# EAGLE board SolderSync_v1_PCB_incomplete (EAGLE 9.7.0)

Size 160 x 116.51 mm. Coordinates in mm from the lower left corner, seen from the top.
Outline: 0,0 160,0 160,116.51 0,116.51 0,0
Copper layers (1*16): Top 0.035mm / dielectric 1.5mm / Bottom 0.035mm
Design rules "Fusion Electronics Design Rules": minimum track width 6mil, minimum drill 0.35mm, track to track 6mil, track to pad 6mil, pad to pad 6mil, via to via 6mil, smd to smd 6mil, copper to edge 40mil, drill to drill 6mil, minimum pad ring 10mil, minimum via ring 8mil, stop-mask expansion 4mil, vias tented up to drill 0mil, thermal gap 10mil

## Footprints (pad centres in the part's own frame; a part is rotated, then mirrored left to right if it is on the bottom)
SW_EVQ22705R_PAN = drill 0.762 pad 1.27 square: 1 0,0 | drill 0.762 pad 1.27: 2 5.004,0
CAPC2012X110 = smd 1.165 x 1.465: 1 -0.875,0; 2 0.875,0
CAPAE830X1050N = smd 3.764 x 2.115: 1 -3.426,0; 2 3.426,0
LEDC2012X110N_FLAT-B = smd 0.762 x 1.362: A 1.025,0; C -1.025,0
SOD-123FL = smd 0.91 x 1.22: A 1.637,0; C -1.637,0
USB-C = smd 0.356 x 0.94: A1 -3.75,3.027; A4 -2.75,3.027; A5 -1.75,3.027; A6 -0.75,3.027; A7 0.75,3.027; A8 1.75,3.027; A9 2.75,3.027; A12 3.75,3.027; B1 3.25,3.027; B4 2.25,3.027; B5 1.25,3.027; B6 0.25,3.027; B7 -0.25,3.027; B8 -1.25,3.027; B9 -2.25,3.027; B12 -3.25,3.027; MID1 -4.25,3.027; MID2 4.25,3.027 | drill 0.025 pad 2.464 long: S_1 -5.4,-0.823; S_2 5.4,-0.823 | drill 0.559 pad 0.559: S_1_H1 -5.4,-0.176; S_1_H2 -5.4,-1.471; S_2_H1 5.4,-0.176; S_2_H2 5.4,-1.471; S_3_H1 -5.4,3.181; S_3_H2 -5.4,1.632; S_4_H1 5.4,3.181; S_4_H2 5.4,1.632 | drill 0.025 pad 2.718 long: S_3 -5.4,2.407; S_4 5.4,2.407
SC59 = smd 1 x 1.4: B -0.95,-1.2; C 0,1.2; E 0.95,-1.2
RESC2012X65 = smd 1.031 x 1.42: 1 -0.919,0; 2 0.919,0
PV36W = drill 1 pad 1.7: 1 0,0; 2 2.54,0; 3 5.08,0
30-PIN = drill 1.016 octagon: 1 -20.32,-1.27; 2 -20.32,1.27; 3 -17.78,-1.27; 4 -17.78,1.27; 5 -15.24,-1.27; 6 -15.24,1.27; 7 -12.7,-1.27; 8 -12.7,1.27; 9 -10.16,-1.27; 10 -10.16,1.27; 11 -7.62,-1.27; 12 -7.62,1.27; 13 -5.08,-1.27; 14 -5.08,1.27; 15 -2.54,-1.27; 16 -2.54,1.27; 17 0,-1.27; 18 0,1.27; 19 2.54,-1.27; 20 2.54,1.27; 21 5.08,-1.27; 22 5.08,1.27; 23 7.62,-1.27; 24 7.62,1.27; 25 10.16,-1.27; 26 10.16,1.27; 27 12.7,-1.27; 28 12.7,1.27; 29 15.24,-1.27; 30 15.24,1.27
ESP32_SCH_PCB = smd 1.499 x 0.889: 1 -8.75,5.26; 2 -8.75,3.99; 3 -8.75,2.72; 4 -8.75,1.45; 5 -8.75,0.18; 6 -8.75,-1.09; 7 -8.75,-2.36; 8 -8.75,-3.63; 9 -8.75,-4.9; 10 -8.75,-6.17; 11 -8.75,-7.44; 12 -8.75,-8.71; 13 -8.75,-9.98; 14 -8.75,-11.25; 25 8.75,-11.25; 26 8.75,-9.98; 27 8.75,-8.71; 28 8.75,-7.44; 29 8.75,-6.17; 30 8.75,-4.9; 31 8.75,-3.63; 32 8.75,-2.36; 33 8.75,-1.09; 34 8.75,0.18; 35 8.75,1.45; 36 8.75,2.72; 37 8.75,3.99; 38 8.75,5.26 | smd 0.889 x 1.499: 15 -5.715,-12.501; 16 -4.445,-12.501; 17 -3.175,-12.501; 18 -1.905,-12.501; 19 -0.635,-12.501; 20 0.635,-12.501; 21 1.905,-12.501; 22 3.175,-12.501; 23 4.445,-12.501; 24 5.715,-12.501 | smd 1.041 x 1.041: 39 -0.681,-2.08; 40 -2.205,-0.556; 41 -2.205,-2.08; 42 -2.205,-3.604; 43 -0.681,-3.604; 44 0.843,-3.604; 45 0.843,-2.08; 46 0.843,-0.556; 47 -0.681,-0.556
_AMS-L = smd 0.838 x 1.168: 1 -2.29,-3.213; 2 0,-3.213; 3 2.29,-3.213 | smd 3.15 x 1.168: 4 0,3.213
_ADS-L = smd 0.838 x 2.184: 1 -2.29,-2.705; 2 0,-2.705; 3 2.29,-2.705 | smd 3.15 x 2.184: 4 0,2.705
SOIC127P600X180-16N = smd 1.31 x 0.62: 1 -2.75,4.445; 2 -2.75,3.175; 3 -2.75,1.905; 4 -2.75,0.635; 5 -2.75,-0.635; 6 -2.75,-1.905; 7 -2.75,-3.175; 8 -2.75,-4.445; 9 2.75,-4.445; 10 2.75,-3.175; 11 2.75,-1.905; 12 2.75,-0.635; 13 2.75,0.635; 14 2.75,1.905; 15 2.75,3.175; 16 2.75,4.445
_MXM-L = smd 1.257 x 0.483: 1 -2.623,1.905; 2 -2.623,0.635; 3 -2.623,-0.635; 4 -2.623,-1.905; 5 2.623,-1.905; 6 2.623,-0.635; 7 2.623,0.635; 8 2.623,1.905
N08E_TEX = drill 0.813 pad 1.524 square: 1 0,0 | drill 0.813 pad 1.524: 2 0,-2.54; 3 0,-5.08; 4 0,-7.62; 5 7.62,-7.62; 6 7.62,-5.08; 7 7.62,-2.54; 8 7.62,0
LCD_SCH = drill 0.127 pad 0.254: 1 21.59,0; 2 20.32,0; 3 19.05,0; 4 17.78,0; 5 16.51,0; 6 15.24,0; 7 13.97,0; 8 12.7,0; 9 11.43,0; 10 10.16,0; 11 8.89,0; 12 7.62,0; 13 6.35,0; 14 5.08,0; 15 3.81,0; 16 2.54,0; 17 1.27,0; 18 0,0
XTALRR488W45L1150T500H350B = drill 0.657 pad 1.257: 1 -2.44,0; 2 2.44,0

## Placement (x,y rotation side)
BOOT  EVQ22705RSW_EVQ22705R_PAN  [SW_EVQ22705R_PAN]  140.97,83.82 0 top
C1  10u  [CAPC2012X110]  86.36,33.02 0 top
C2  100n  [CAPC2012X110]  86.36,27.94 0 top
C3  10u  [CAPC2012X110]  74.93,11.43 0 top
C4  100n  [CAPC2012X110]  67.31,11.43 0 top
C5  100n  [CAPC2012X110]  81.28,4.6 0 top
C6  100u  [CAPC2012X110]  81.28,11.43 0 top
C7  100n  [CAPC2012X110]  82.55,54.61 0 top
C8  100u  [CAPC2012X110]  82.55,46.99 0 top
C9  22p  [CAPC2012X110]  63.5,55.88 0 top
C10  22p  [CAPC2012X110]  63.5,48.26 0 top
C11  0.1u  [CAPC2012X110]  63.5,27.94 0 top
C12  1n  [CAPC2012X110]  130.81,62.23 0 top
C13  1n  [CAPC2012X110]  130.81,54.61 0 top
C14  0.01u  [CAPC2012X110]  11.43,106.68 0 top
C15  0.01u  [CAPC2012X110]  11.43,50.8 0 top
C16  0.01u  [CAPC2012X110]  11.43,19.05 0 top
C17  0.01u  [CAPC2012X110]  62.23,105.41 0 top
C18  22p  [CAPC2012X110]  60.96,82.55 0 top
C19  [CAPAE830X1050N]  53.34,86.36 0 top
C20  1000u  [CAPAE830X1050N]  97.79,110.49 0 top
C21  100n  [CAPC2012X110]  95.25,100.33 0 top
C22  100u  [CAPC2012X110]  95.25,92.71 0 top
C23  100u  [CAPC2012X110]  95.25,85.09 0 top
C24  10u  [CAPC2012X110]  95.25,77.47 0 top
D1  LED  [LEDC2012X110N_FLAT-B]  120.65,90.17 0 top
D2  LED  [LEDC2012X110N_FLAT-B]  120.65,82.55 0 top
D3  1N4007  [SOD-123FL]  62.23,100.33 0 top
D4  1N4007  [SOD-123FL]  62.23,96.52 0 top
D5  1N4007  [SOD-123FL]  62.23,92.71 0 top
D6  1N4007  [SOD-123FL]  62.23,88.9 0 top
D7  LED  [LEDC2012X110N_FLAT-B]  95.25,20.32 0 top
D8  LED  [LEDC2012X110N_FLAT-B]  95.25,5.08 0 top
EN  EVQ22705RSW_EVQ22705R_PAN  [SW_EVQ22705R_PAN]  142.24,39.37 0 top
J1  USB-CCX90M-16P_HIR  [USB-C]  132.08,102.87 0 top
Q1  J3Y_NPN  [SC59]  49.53,24.13 0 top
Q2  J3Y_NPN  [SC59]  49.53,16.51 0 top
R1  1k  [RESC2012X65]  64.77,40.64 0 top
R2  1k  [RESC2012X65]  64.77,35.56 0 top
R3  10k  [RESC2012X65]  41.91,20.32 0 top
R4  10k  [RESC2012X65]  64.77,19.05 0 top
R5  470  [RESC2012X65]  129.54,92.71 0 top
R6  10k  [RESC2012X65]  129.54,85.09 0 top
R7  470  [RESC2012X65]  129.54,77.47 0 top
R8  10k  [RESC2012X65]  129.54,69.85 0 top
R9  5.11k  [RESC2012X65]  119.38,105.41 0 top
R10  5.11k  [RESC2012X65]  119.38,97.79 0 top
R11  1k  [RESC2012X65]  118.11,74.93 0 top
R12  1k  [RESC2012X65]  118.11,67.31 0 top
R13  150  [RESC2012X65]  50.8,74.93 0 top
R14  150  [RESC2012X65]  50.8,67.31 0 top
R15  150  [RESC2012X65]  50.8,59.69 0 top
R16  150  [RESC2012X65]  50.8,52.07 0 top
R17  0  [RESC2012X65]  95.25,69.85 0 top
R18  10k  [PV36W]  96.52,36.83 0 top
R19  1k  [RESC2012X65]  95.25,27.94 0 top
R20  1k  [RESC2012X65]  95.25,12.7 0 top
SV2  [30-PIN]  153.67,38.1 90 top
U1  ESP32ESP-WROOM-32_EXP  [ESP32_SCH_PCB]  121.92,41.91 0 top
U2  AMS1117-5.0_AMS-L  [_AMS-L]  76.2,29.21 0 top
U3  AMS1117-3.3_ADS-L  [_ADS-L]  76.2,17.78 0 top
U4  CH340G  [SOIC127P600X180-16N]  76.2,52.07 0 top
U5  MAX31855_MXM-L  [_MXM-L]  25.4,95.25 0 top
U6  MAX31855_MXM-L  [_MXM-L]  25.4,71.12 0 top
U7  MAX31855_MXM-L  [_MXM-L]  25.4,39.37 0 top
U8  MAX31855_MXM-L  [_MXM-L]  25.4,7.62 0 top
U9  LM386_N-1  [N08E_TEX]  105.41,62.23 0 top
U$1  LCD_DEVBOARD  [LCD_SCH]  134.62,2.54 0 top
XTAL1  12MHz  [XTALRR488W45L1150T500H350B]  52.07,39.37 0 top

## Library data of the parts
BOOT EN = SD-SolderSync-Library; COPYRIGHT: Copyright (C) 2024 Ultra Librarian. All rights reserved.; MANUFACTURER_PART_NUMBER: EVQ-22705R; MFR_NAME: Panasonic
C1-C24 = Capacitor; CATEGORY: Capacitor
D1 D2 D7 D8 = LED; CATEGORY: LED; COLOR: BLUE; DESCRIPTION: CHIP LED FLAT; SUB-CATEGORY: CHIP; TYPE: FLAT_TOP
D3-D6 = adafruit
J1 = SD-SolderSync-Library; COPYRIGHT: Copyright (C) 2024 Ultra Librarian. All rights reserved.; MANUFACTURER_PART_NUMBER: CX90M-16P; MFR_NAME: Hirose
Q1 Q2 = Transistor; CATEGORY: Transistor; SUB-CATEGORY: BJT; TYPE: NPN
R1-R17 R19 R20 = Resistor; CATEGORY: Resistor; SUB-CATEGORY: Fixed
R18 = Tinkercad; CATEGORY: Resistor; DESCRIPTION: Lead Sealed Type Multiturn PV36 Series; MANUFACTURER: BOURNS; MPN: PV36W; OPERATING_TEMPERATURE: -55 to +125 °C; PART_STATUS: Active; ROHS_COMPLIANCE: RoHS Compliant; SERIES: PV36; SUB-CATEGORY: Trimpot; TYPE: Lead Sealed
SV2 = SD-SolderSync-Library; OC_FARNELL: unknown; OC_NEWARK: unknown
U1 = SD-SolderSync-Library; COPYRIGHT: Copyright (C) 2024 Ultra Librarian. All rights reserved.; MANUFACTURER_PART_NUMBER: ESP-WROOM-32; MFR_NAME: Espressif Systems
U2 = SD-SolderSync-Library; COPYRIGHT: Copyright (C) 2024 Ultra Librarian. All rights reserved.; MANUFACTURER_PART_NUMBER: AMS1117-5.0; MFR_NAME: ams OSRAM
U3 = SD-SolderSync-Library; COPYRIGHT: Copyright (C) 2024 Ultra Librarian. All rights reserved.; MANUFACTURER_PART_NUMBER: AMS1117-3.3; MFR_NAME: Advanced Monolithic Systems
U4 = SD-SolderSync-Library; AVAILABILITY: Not in stock; CHECK_PRICES: https://www.snapeda.com/parts/Ch340G/WCH/view-part/?ref=eda; DESCRIPTION: USB Interface Integrated Circuit; MF: WCH; MP: Ch340G; PACKAGE: None; PRICE: None; SNAPEDA_LINK: https://www.snapeda.com/parts/Ch340G/WCH/view-part/?ref=snap
U5-U8 = SD-SolderSync-Library; COPYRIGHT: Copyright (C) 2024 Ultra Librarian. All rights reserved.; MANUFACTURER_PART_NUMBER: MAX31855KASA+; MFR_NAME: Analog Devices Inc
U9 = SD-SolderSync-Library; COPYRIGHT: Copyright (C) 2024 Ultra Librarian. All rights reserved.; MANUFACTURER_PART_NUMBER: LM386N-1/NOPB; MFR_NAME: Texas Instruments
U$1 = SD-SolderSync-Library
XTAL1 = Frequency-Source; CATEGORY: Frequency-Source; SERIES: HC49; SUB-CATEGORY: Crystal-2Pin

## Nets
3V3: C7.1 C8.1 C11.1 R6.2 R8.2 R12.2 SV2.1 U1.2 U3.2 U3.4 U4.4 U5.4 U6.4 U7.4 U8.4 U$1.7
5V: C3.1 C4.1 C5.1 C6.1 C22.1 J1.A4 J1.A9 J1.B4 J1.B9 U2.2 U2.4 U3.3 U4.16 U9.6 U$1.14
CC1: J1.A5 R10.2
CC2: J1.B5 R9.2
D0: U1.25
D2/TFT_DC: SV2.7 U1.24 U$1.10
D4/TFT_RST: SV2.9 U1.26 U$1.11
D5: SV2.15 U1.29
D12: SV2.8 U1.14
D13/HEAT_MCU: R19.2 SV2.6 U1.16
D14/TCL_CS: SV2.10 U1.13 U5.6
D15/TFT_CS: SV2.5 U1.23 U$1.12
D18/TFT_SCK: SV2.17 U1.30 U$1.5 U$1.8
D19/TFT_MISO: SV2.19 U1.31 U$1.2 U$1.6
D21/TCH_CS: SV2.21 U1.33 U$1.4
D22: SV2.27 U1.36
D23/TFT_MOSI: SV2.29 U1.37 U$1.3 U$1.9
D25/TCL_CS: SV2.16 U1.10 U6.6
D26/TCL_MISO: SV2.14 U1.11 U5.7 U6.7 U7.7 U8.7
D27/TCL_SCK: R13.2 R14.2 R15.2 R16.2 SV2.12 U1.12
D32/TCL_CS: SV2.20 U1.8 U8.6
D33/TCL_CS: SV2.18 U1.9 U7.6
D34/AUDIO: R18.1 SV2.24 U1.6
D35/FAN_MCU: R20.2 SV2.22 U1.7
D+: J1.A6 J1.B6 U4.5
D-: J1.A7 J1.B7 U4.6
DTR: Q2.E R3.1 U4.13
EN: Q1.C R7.2 R8.1 SV2.30 U1.3
GND: BOOT.1 C1.2 C2.2 C3.2 C4.2 C5.2 C6.2 C7.2 C8.2 C9.2 C10.2 C11.2 C12.1 C13.1 C18.2 C19.2 C21.2 C22.2 C23.2 D1.C D2.C D3.A D5.A D7.C D8.C EN.1 J1.A1 J1.A12 J1.B1 J1.B12 R9.1 R10.1 R18.3 SV2.3 SV2.4 U1.1 U1.15 U1.38 U1.39 U1.40 U1.41 U1.42 U1.43 U1.44 U1.45 U1.46 U1.47 U2.1 U3.1 U4.1 U5.1 U6.1 U7.1 U8.1 U9.2 U9.4 U$1.13
IO0: Q2.C R5.2 R6.1
IO2: R11.2
N$1: D1.A R11.1
N$2: Q1.B R3.2
N$3: BOOT.2 C12.2 R5.1
N$4: Q2.B R4.1
N$5: C14.2 U5.3
N$6: D2.A R12.1
N$7: D3.C D4.A
N$8: C13.2 EN.2 R7.1
N$9: D5.C D6.A
N$10: C14.1 U5.2
N$11: C15.2 U6.3
N$12: C20.1 C21.1 U9.5
N$13: C20.2
N$14: C15.1 U6.2
N$15: C16.2 U7.3
N$16: C23.1 U9.7
N$18: C16.1 U7.2
N$19: C17.2 U8.3
N$20: C24.1 R17.2
N$22: C17.1 U8.2
N$23: R17.1 U9.1
N$24: C24.2 U9.8
N$25: R18.2 U9.3
N$26: D7.A R19.1
N$27: D8.A R20.1
RTS: Q1.E R4.2 U4.14
RX0: SV2.23 U1.34
RX2: SV2.11 U1.27
RXD: R2.2 U4.3
RXD0: R1.1
SD_CS: U$1.15
SD_MISO: U$1.17
SD_MOSI: U$1.16
SD_SCK: U$1.18
T_IRQ: U$1.1
TCL_SCK1: R13.1 U5.5
TCL_SCK2: R14.1 U6.5
TCL_SCK3: R15.1 U7.5
TCL_SCK4: R16.1 U8.5
TX0: SV2.25 U1.35
TX2: SV2.13 U1.28
TXD: R1.2 U4.2
TXD0: R2.1
VIN/12VDC: C1.1 C2.1 C18.1 C19.1 D4.C D6.C SV2.2 U2.3
VN: SV2.26 U1.5
VP: SV2.28 U1.4
XO: C9.1 C10.1 U4.7 U4.8 XTAL1.1 XTAL1.2

## Tracks (layer width: path | path; a pad name or v marks a point on that pad's centre or on a via)
3V3  (15 unrouted)
5V  (14 unrouted)
CC1  (1 unrouted)
CC2  (1 unrouted)
D2/TFT_DC  (2 unrouted)
D4/TFT_RST  (2 unrouted)
D5  (1 unrouted)
D12  (1 unrouted)
D13/HEAT_MCU  (2 unrouted)
D14/TCL_CS  (2 unrouted)
D15/TFT_CS  (2 unrouted)
D18/TFT_SCK  (3 unrouted)
D19/TFT_MISO  (3 unrouted)
D21/TCH_CS  (2 unrouted)
D22  (1 unrouted)
D23/TFT_MOSI  (3 unrouted)
D25/TCL_CS  (2 unrouted)
D26/TCL_MISO  (5 unrouted)
D27/TCL_SCK  (5 unrouted)
D32/TCL_CS  (2 unrouted)
D33/TCL_CS  (2 unrouted)
D34/AUDIO  (2 unrouted)
D35/FAN_MCU  (2 unrouted)
D+  (2 unrouted)
D-  (2 unrouted)
DTR  (2 unrouted)
EN  (4 unrouted)
GND  (56 unrouted)
IO0  (2 unrouted)
N$1  (1 unrouted)
N$2  (1 unrouted)
N$3  (2 unrouted)
N$4  (1 unrouted)
N$5  (1 unrouted)
N$6  (1 unrouted)
N$7  (1 unrouted)
N$8  (2 unrouted)
N$9  (1 unrouted)
N$10  (1 unrouted)
N$11  (1 unrouted)
N$12  (2 unrouted)
N$14  (1 unrouted)
N$15  (1 unrouted)
N$16  (1 unrouted)
N$18  (1 unrouted)
N$19  (1 unrouted)
N$20  (1 unrouted)
N$22  (1 unrouted)
N$23  (1 unrouted)
N$24  (1 unrouted)
N$25  (1 unrouted)
N$26  (1 unrouted)
N$27  (1 unrouted)
RTS  (2 unrouted)
RX0  (1 unrouted)
RX2  (1 unrouted)
RXD  (1 unrouted)
TCL_SCK1  (1 unrouted)
TCL_SCK2  (1 unrouted)
TCL_SCK3  (1 unrouted)
TCL_SCK4  (1 unrouted)
TX0  (1 unrouted)
TX2  (1 unrouted)
TXD  (1 unrouted)
VIN/12VDC  (7 unrouted)
VN  (1 unrouted)
VP  (1 unrouted)
XO  (5 unrouted)